# Altium PCB embedded-dev-26.PcbDoc
Units mil, origin at the board's own origin, x right, y up, seen from the top; angles counter-clockwise.
Board outline 6000 x 4000 mil, 2 copper layers (Top Layer, Bottom Layer); 113 components, 115 nets, 490 pads, 0 vias.
Unrouted connection lines stored in the file: 355.
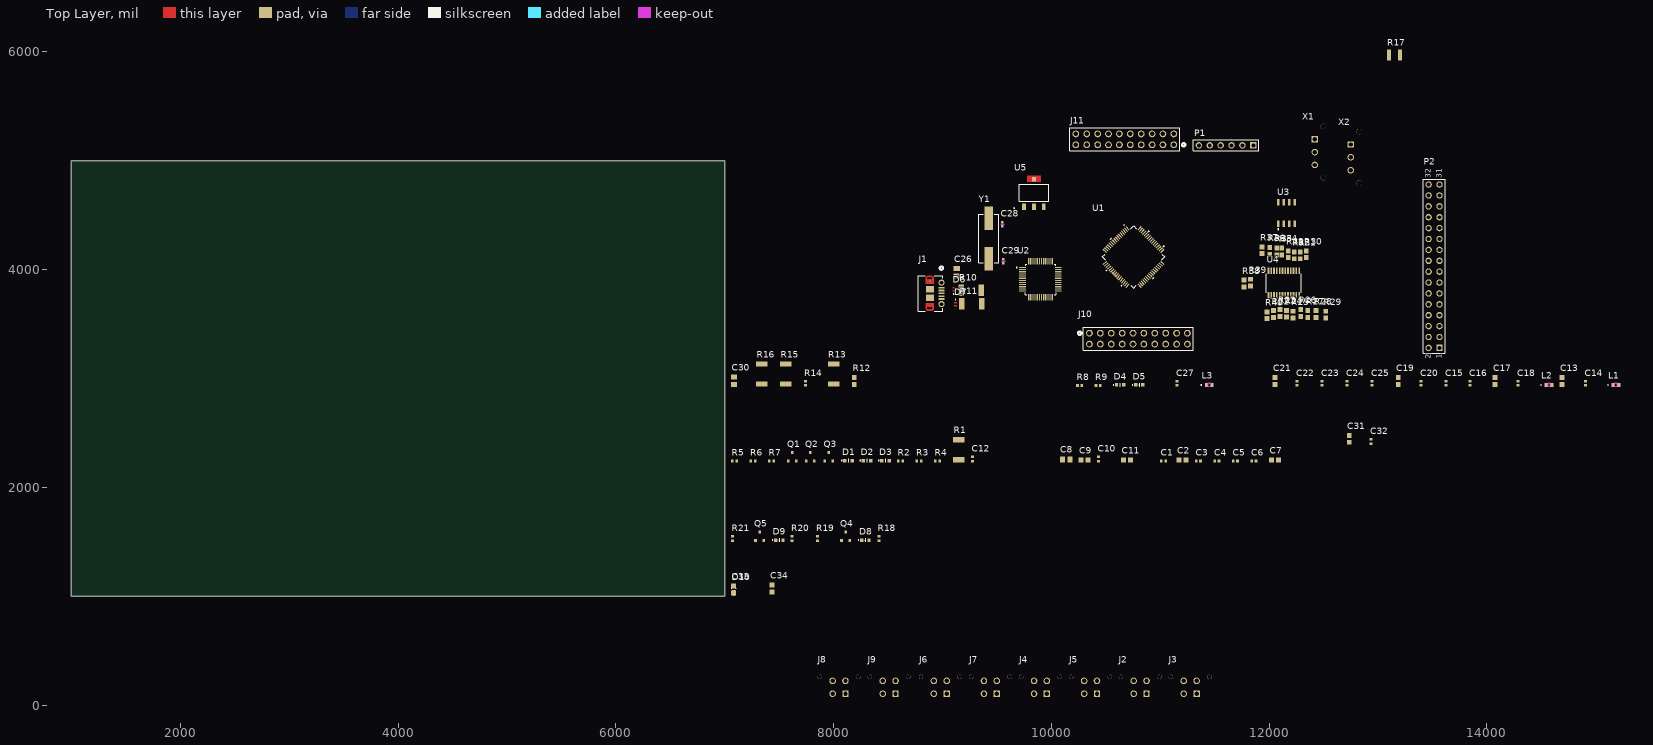
[diagram p0: Top Layer view]
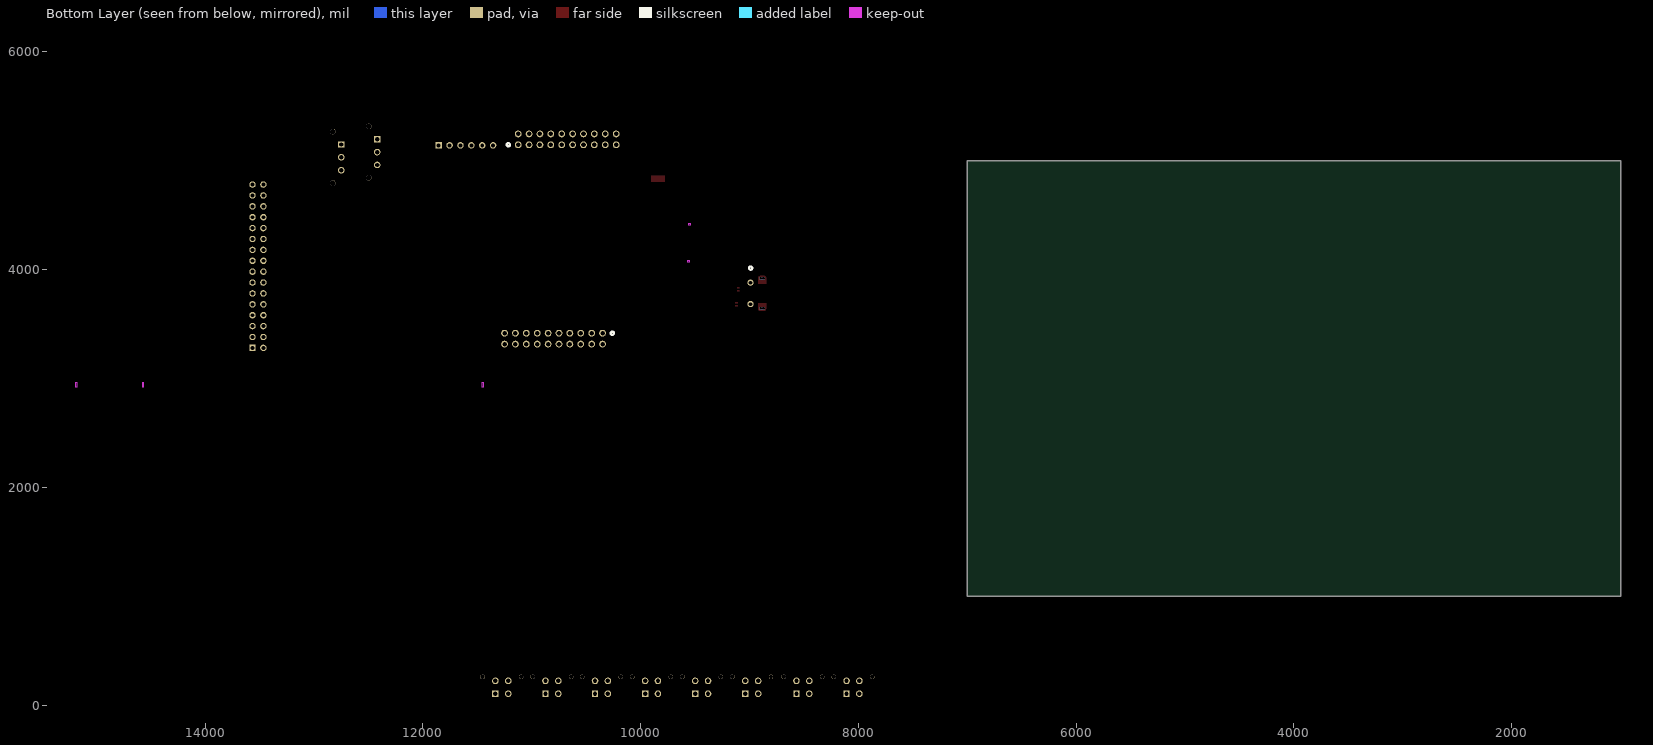
[diagram p1: Bottom Layer view, seen from below]

## Layer stack, top to bottom
Top Solder: solder mask 0.4, Solder Resist, Dk 3.5
Top Layer: signal copper 1.4
Dielectric 1: dielectric 12.6, FR-4, Dk 4.8
Bottom Layer: signal copper 1.4
Bottom Solder: solder mask 0.4, Solder Resist, Dk 3.5

## Board outline
1000,1000 7000,1000 7000,5000 1000,5000

## Design rules (kind name [scope] priority, off if disabled: settings)
Clearance [All] p1: gap=10 ignorepadtopadclearanceinfootprint=FALSE
DiffPairsRouting [All] p1: maxlimit=10 minlimit=10 mostfreqgap=10 toplayer_minwidth=15 toplayer_maxwidth=15 toplayer_prefwidth=15 bottomlayer_minwidth=15 bottomlayer_maxwidth=15 bottomlayer_prefwidth=15 maxuncoupledlength=500
PolygonConnect [All] p1: connectstyle=Relief reliefconductorwidth=10 reliefentries=4 polygonreliefangle="90 Angle" airgapwidth=10
RoutingVias [All] p1: holewidth=28 width=50 viastyle="Through Hole" minholewidth=28 minwidth=50 maxholewidth=28 maxwidth=50
SolderMaskExpansion [All] p1: expansion=4 istentingtop=FALSE
SupplyNets "Schematic Supply Nets_3" [InNet('5V')] p1: voltage=0.000
SupplyNets "Schematic Supply Nets_2" [InNet('3V3')] p2: voltage=0.000
SupplyNets "Schematic Supply Nets_1" [InNet('GND')] p3: voltage=0.000
Width [All] p1: maxlimit=10 minlimit=10 preferedwidth=10
29 further rules are at their usual default settings.

## Classes and differential pairs
component class U_USB_To_UART: C13 C14 C15 C16 C17 C18 C19 C20 C21 C22 C23 C24 C25 C26 C27 C28 C29 C30 D4 D5 D6 D7 D10 J1 L1 L2 L3 R8 R9 R10 R11 R12 R13 R14 R15 R16 U2 Y1
component class U_MCU: C1 C2 C3 C4 C5 C6 C7 C8 C9 C10 C11 C12 D1 D2 D3 J10 J11 P1 Q1 Q2 Q3 R1 R2 R3 R4 R5 R6 R7 U1
component class U_I2C_MUX: C31 C32 J2 J3 J4 J5 J6 J7 J8 J9 P2 R22 R23 R24 R25 R26 R27 R28 R29 R30 R31 R32 R33 R34 R35 R36 R37 R38 R39 R40 U4
component class U_CAN: D8 D9 Q4 Q5 R17 R18 R19 R20 R21 U3 X1 X2
component class U_3V3_LDO: C33 C34 U5
differential pair Data: +Data_P -Data_N
differential pair Data_In: +Data_In_P -Data_In_N
differential pair CAN: +CAN_H -CAN_L

## Components (designator, comment, footprint, x,y, rotation, side; value= is the part's Value field where it differs from the comment)
C1 "CC0402KRX7R7BB104" CAP-0402 11030,2240 r0 top
C2 "CC0603KRX5R8BB475" CAP-0603 11205,2250 r0 top
C3 "CC0402KRX7R7BB104" CAP-0402 11350,2240 r0 top
C4 "CC0402KRX7R7BB104" CAP-0402 11520,2240 r0 top
C5 "CC0402KRX7R7BB104" CAP-0402 11690,2240 r0 top
C6 "CC0402KRX7R7BB104" CAP-0402 11860,2240 r0 top
C7 "CC0603KRX5R8BB475" CAP-0603 12055,2250 r0 top
C8 "GRM2195C1H103JA01D" CAP-0805 10135,2255 r0 top
C9 "CC0603KRX7R7BB105" CAP-0603 10305,2250 r0 top
C10 "CC0402KRX7R7BB104" CAP-0402 10435,2260 r90 top
C11 "CC0603KRX7R7BB105" CAP-0603 10695,2250 r0 top
C12 "CC0402KRX7R7BB104" CAP-0402 9275,2260 r90 top
C13 "CC0603KRX5R8BB475" CAP-0603 14690,2975 r90 top
C14 "CC0402KRX7R7BB104" CAP-0402 14905,2955 r90 top
C15 "CC0402KRX7R7BB104" CAP-0402 13625,2955 r90 top
C16 "CC0402KRX7R7BB104" CAP-0402 13845,2955 r90 top
C17 "CC0603KRX5R8BB475" CAP-0603 14075,2975 r90 top
C18 "CC0402KRX7R7BB104" CAP-0402 14285,2955 r90 top
C19 "CC0603KRX5R8BB475" CAP-0603 13185,2975 r90 top
C20 "CC0402KRX7R7BB104" CAP-0402 13395,2955 r90 top
C21 "CC0603KRX5R8BB475" CAP-0603 12055,2975 r90 top
C22 "CC0402KRX7R7BB104" CAP-0402 12255,2955 r90 top
C23 "CC0402KRX7R7BB104" CAP-0402 12485,2955 r90 top
C24 "CC0402KRX7R7BB104" CAP-0402 12715,2955 r90 top
C25 "CC0402KRX7R7BB104" CAP-0402 12945,2955 r90 top
C26 "GRM2195C1H103JA01D" CAP-0805 9130,3975 r90 top
C27 "CC0402JRNPO9BN101" CAP-0402 11155,2955 r90 top
C28 "CC0402JRNPO9BN500" CAP_CC0402_YAG 9550,4415 r270 top
C29 "CC0402JRNPO9BN500" CAP_CC0402_YAG 9560,4075 r90 top
C30 "GRM2195C1H103JA01D" CAP-0805 7085,2980 r90 top
C31 "CC0603KRX5R8BB475" CAP-0603 12735,2445 r90 top
C32 "CC0402KRX7R7BB104" CAP-0402 12935,2420 r90 top
C33 "CC0603KRX5R8BB475" CAP-0603 7080,1060 r90 top
C34 "CC0603KRX7R7BB105" CAP-0603 7435,1070 r90 top
D1 "BL-HKC36G-AV-TRB" LED-0603 8080,2215 r0 top
D2 "BL-HKC36G-AV-TRB" LED-0603 8250,2215 r0 top
D3 "BL-HKC36G-AV-TRB" LED-0603 8420,2215 r0 top
D4 "BL-HKC36G-AV-TRB" LED-0603 10575,2910 r0 top
D5 "BL-HKC36G-AV-TRB" LED-0603 10750,2910 r0 top
D6 "ESD321DPYR" TVS_ESD321DPYR 9105,3818.78 r90 top
D7 "ESD321DPYR" TVS_ESD321DPYR 9120,3681.22 r270 top
D8 "BL-HKC36G-AV-TRB" LED-0603 8235,1485 r0 top
D9 "BL-HKC36G-AV-TRB" LED-0603 7445,1485 r0 top
D10 "ESDA7P60-1U1M" TVS_ESDA7P60-1U1M 7085,1070 r90 top
J1 "1050170001" CONN_1050170001_MOL 8890.39,3780.59 r270 top
J2 "Molex 43045-0412" CONN-4POS-0002 10815,103.43 r0 top
J3 "Molex 43045-0412" CONN-4POS-0002 11275,103.43 r0 top
J4 "Molex 43045-0412" CONN-4POS-0002 9900,103.43 r0 top
J5 "Molex 43045-0412" CONN-4POS-0002 10360,103.43 r0 top
J6 "Molex 43045-0412" CONN-4POS-0002 8980,103.43 r0 top
J7 "Molex 43045-0412" CONN-4POS-0002 9440,103.43 r0 top
J8 "Molex 43045-0412" CONN-4POS-0002 8050,103.43 r0 top
J9 "Molex 43045-0412" CONN-4POS-0002 8510,103.43 r0 top
J10 "10897201" CONN20_0010897201_MOL 10350,3415 r0 top
J11 "10897201" CONN20_0010897201_MOL 11125,5145 r180 top
L1 "BLM18AG601SN1D" FILTER_BLM18AG_MUR-L 15185,2940 r0 top
L2 "BLM18AG601SN1D" FILTER_BLM18AG_MUR-L 14570,2940 r0 top
L3 "BLM18AG601SN1D" FILTER_BLM18AG_MUR-L 11450,2940 r0 top
P1 "Header 6" HDR1X6 11855,5140 r180 top
P2 "61303421121" HDR2X16 13565,3280 r90 top
Q1 "T2N7002AK,LM" IC-SOT23-3 7620,2280 r0 top
Q2 "T2N7002AK,LM" IC-SOT23-3 7785,2280 r0 top
Q3 "T2N7002AK,LM" IC-SOT23-3 7955,2280 r0 top
Q4 "T2N7002AK,LM" IC-SOT23-3 8110,1550 r0 top
Q5 "T2N7002AK,LM" IC-SOT23-3 7320,1550 r0 top
R1 "CRF2010-J/-000ELF" RES-2010 9150,2345 r90 top
R2 "RC0402FR-07100RL" RES-0402 8615,2240 r0 top
R3 "RC0402FR-07100RL" RES-0402 8785,2240 r0 top
R4 "RC0402FR-07100RL" RES-0402 8955,2240 r0 top
R5 "RC0402FR-07470RL" RES-0402 7090,2240 r0 top
R6 "RC0402FR-07470RL" RES-0402 7260,2240 r0 top
R7 "RC0402FR-07470RL" RES-0402 7430,2240 r0 top
R8 "RM04FTN2200" RES-0402 10260,2935 r0 top
R9 "RM04FTN2200" RES-0402 10430,2935 r0 top
R10 "CRF2010-J/-000ELF" RES-2010 9263.46,3810 r180 top
R11 "CRF2010-J/-000ELF" RES-2010 9270,3685 r180 top
R12 "RC0603FR-0712KL" RES-0603 8190,2975 r90 top
R13 "CRF2010-J/-000ELF" RES-2010 8000,3040 r90 top
R14 "RC0402FR-0710KL" RES-0402 7740,2955 r90 top
R15 "CRF2010-J/-000ELF" RES-2010 7560,3040 r90 top
R16 "CRF2010-J/-000ELF" RES-2010 7340,3040 r90 top
R17 "RC1210FR-07120RL" RES-1210 13150,5970 r0 top
R18 "RC0402FR-07100RL" RES-0402 8415,1530 r90 top
R19 "RC0402FR-07470RL" RES-0402 7850,1530 r90 top
R20 "RC0402FR-07100RL" RES-0402 7620,1530 r90 top
R21 "RC0402FR-07470RL" RES-0402 7070,1530 r90 top
R22 "RC0603FR-074K7L" RES-0603 12040,3590 r90 top
R23 "RC0603FR-074K7L" RES-0603 12100,3600 r90 top
R24 "RC0603FR-074K7L" RES-0603 12160,3593.5 r90 top
R25 "RC0603FR-074K7L" RES-0603 12220,3585 r90 top
R26 "RC0603FR-074K7L" RES-0603 12290,3600 r90 top
R27 "RC0603FR-074K7L" RES-0603 12355,3590 r90 top
R28 "RC0603FR-074K7L" RES-0603 12430,3590 r90 top
R29 "RC0603FR-074K7L" RES-0603 12520,3585 r90 top
R30 "RC0603FR-074K7L" RES-0603 12340,4140 r270 top
R31 "RC0603FR-074K7L" RES-0603 12285,4130 r270 top
R32 "RC0603FR-074K7L" RES-0603 12230,4130 r270 top
R33 "RC0603FR-074K7L" RES-0603 12175,4140 r270 top
R34 "RC0603FR-074K7L" RES-0603 12115,4165 r270 top
R35 "RC0603FR-074K7L" RES-0603 12070,4166.5 r270 top
R36 "RC0603FR-074K7L" RES-0603 12005,4171.5 r270 top
R37 "RC0603FR-074K7L" RES-0603 11935,4176.5 r270 top
R38 "RC0603FR-074K7L" RES-0603 11770,3870 r90 top
R39 "RC0603FR-074K7L" RES-0603 11830,3878.5 r90 top
R40 "RC0603FR-074K7L" RES-0603 11980,3580 r90 top
U1 "STM32G431RBT6" LQFP64-10x10mm 10755,4115 r315 top
U2 "FT232HL-REEL" QFP50P900X900X160-48N 9900,3910 r0 top
U3 "TCAN1044VDRQ1" IC-8SOIC 12160,4518.43 r0 top
U4 "TCA9548APWR" SOP65P640X120-24N 12135,3875 r90 top
U5 "MCP1826S-3302E/DB" SOT-223_3MC_MCH 9840,4705 r0 top
X1 "Molex 43650-0315" 43650-0315 12420,5078.11 r90 top
X2 "Molex 43650-0315" 43650-0315 12750,5030 r90 top
Y1 "830010043" WE-XTAL_HC49/4HSMX 9425,4285 r270 top

## Footprints (in the part's own frame and the unit in brackets; to place one, negate y for a bottom-side part, rotate by r counter-clockwise, add the part's x,y. Pads: shape width x height; smd on the part's side, far side on the other; paste and mask are expansions set on the pad)
43650-0315 [mm]
  round 1.27 hole 1.27 unplated: 1(-6,-1.96) 1(6,-1.96)
  rect 1.482x1.482 / inner rect 1.524x1.524 / far side rect 1.482x1.482 hole 1.02: P$1(3,0)
  round 1.53 / inner round 1.524 / far side round 1.53 hole 1.02: P$2(0,0) P$3(-3,0)
  body extent -6.32,-2.47 6.33,3.14, height 10.03
CAP-0402 [mm]
  rect 0.6x0.7 smd: 1(-0.5,0) 2(0.5,0)
  body extent -0.5,-0.22 0.5,0.23, height 0.5
CAP-0603 [mm]
  rect 1.15x1.1 smd: 1(-0.8,0) 2(0.8,0)
  body extent -0.8,-0.45 0.8,0.45, height 0.8
CAP-0805 [mm]
  rect 1.16x1.47 smd: 1(-0.88,0) 2(0.88,0)
  body extent -1,-0.63 1,0.63, height 0.94
CAP_CC0402_YAG [mil]
  rect 22x22 smd paste+0 mask+0: 1(-17.5,0) 2(17.5,0)
  Top Layer keep-out region: -4.5,-9 -4.5,9 4.5,9 4.5,-9
  Keep-Out Layer region: -4.5,-11 -4.5,11 4.5,11 4.5,-11
  body extent -21,-11 21,11, height 22
CONN20_0010897201_MOL [mil]
  round 62 / inner round 60 / far side round 62 hole 42 paste-99999 mask+0: 1(0,0) 2(0,-100) 3(100,0) 4(100,-100) 5(200,0) 6(200,-100) 7(300,0) 8(300,-100) 9(400,0) 10(400,-100) 11(500,0) 12(500,-100) 13(600,0) 14(600,-100) 15(700,0) 16(700,-100) 17(800,0) 18(800,-100) 19(900,0) 20(900,-100)
  silkscreen extent -105,-155 955,55
CONN-4POS-0002 [mm]
  round 1.02 hole 1.02 unplated: 1(-4.5,3.94) 1(4.5,3.94)
  rect 1.482x1.482 / inner rect 1.524x1.524 / far side rect 1.482x1.482 hole 1.02: 1(1.5,0)
  round 1.53 / inner round 1.524 / far side round 1.53 hole 1.02: 2(-1.5,0) 3(1.5,3) 4(-1.5,3)
  body extent -5.07,-2.45 5.08,6.32, height 10.03
CONN_1050170001_MOL [mil]
  rect 16x53 smd paste+0 mask+0: 1(-51.18,99.61) 2(-25.59,99.61) 3(0,99.61) 4(25.59,99.61) 5(51.18,99.61)
  round 57 / inner round 60 / far side round 57 hole 33 paste-99999 mask-28.5: 6(-98.43,100.59) 7(98.43,100.59)
  rect 5x5 smd paste-2.5 mask-2.5: 8(-114.17,-5.7) 9(114.17,-5.7)
  rect 59x75 smd paste-37.5 mask-37.5: 10(-39.37,-5.7) 11(39.37,-5.7)
  round 24 / inner round 60 / far side round 24 hole 24 unplated paste-99999 mask+0: S_1_H1(-137.8,7.8) S_1_H2(-137.8,-19.2) S_2_H1(137.8,7.8) S_2_H2(137.8,-19.2)
  Top Layer region: -142.38,31.34 -137.67,31.8 -90.67,31.8 -90.67,-43.2 -137.67,-43.2 -142.38,-42.75 -146.79,-41.42 -150.85,-39.24 -154.41,-36.32 -157.33,-32.76 -159.51,-28.7 -160.84,-24.29 -161.3,-19.7 -161.3,8.3 -160.84,12.88 -159.51,17.29 -157.33,21.35 -154.41,24.91 -150.85,27.83 -146.79,30.01
  Top Layer region: 90.67,-43.2 90.67,31.8 137.8,31.8 142.38,31.34 146.79,30.01 150.85,27.83 154.41,24.91 157.33,21.35 159.51,17.29 160.84,12.88 161.3,8.3 161.3,-19.7 160.84,-24.29 159.51,-28.7 157.33,-32.76 154.41,-36.32 150.85,-39.24 146.79,-41.42 142.38,-42.75 137.8,-43.2
  Multi-Layer lines w24: 137.8,-19.2 137.8,7.8 ; -137.8,-19.2 -137.8,7.8
  silkscreen extent -247,-112 163,115, body extent -161,-99 161,113, height 113
FILTER_BLM18AG_MUR-L [mil]
  rect 30x35 smd paste+0 mask+0: 1(-25.5,0) 2(25.5,0)
  Top Layer keep-out region: -8.5,-16.5 -8.5,16.5 8.5,16.5 8.5,-16.5
  Keep-Out Layer region: -8.5,-18.5 -8.5,18.5 8.5,18.5 8.5,-18.5
  silkscreen extent -76,-3 -70,3, body extent -34,-19 34,19, height 37
HDR1X6 [mm] "Connector; Header; 6 Position"
  rect 1.5x1.5 hole 0.9: 1(0,0)
  round 1.5 hole 0.9: 2(2.54,0) 3(5.08,0) 4(7.62,0) 5(10.16,0) 6(12.7,0)
  silkscreen extent -1.27,-1.27 13.97,1.27
HDR2X16 [mm] "Connector; Header; 16x2 Position"
  rect 1.5x1.5 hole 0.9: 1(0,0)
  round 1.5 hole 0.9: 2(0,2.54) 3(2.54,0) 4(2.54,2.54) 5(5.08,0) 6(5.08,2.54) 7(7.62,0) 8(7.62,2.54) 9(10.16,0) 10(10.16,2.54) 11(12.7,0) 12(12.7,2.54) 13(15.24,0) 14(15.24,2.54) 15(17.78,0) 16(17.78,2.54) 17(20.32,0) 18(20.32,2.54) 19(22.86,0) 20(22.86,2.54) 21(25.4,0) 22(25.4,2.54) 23(27.94,0) 24(27.94,2.54) 25(30.48,0) 26(30.48,2.54) 27(33.02,0) 28(33.02,2.54) 29(35.56,0) 30(35.56,2.54) 31(38.1,0) 32(38.1,2.54)
  silkscreen extent -1.27,-1.27 39.37,3.81
IC-8SOIC [mm]
  rect 0.6x1.5 smd: 1(-1.905,-2.5) 2(-0.635,-2.5) 3(0.635,-2.5) 4(1.905,-2.5) 5(1.905,2.5) 6(0.635,2.5) 7(-0.635,2.5) 8(-1.905,2.5)
  silkscreen extent -2.03,-3.93 -1.78,-3.69, body extent -2.45,-3 2.45,3, height 1.75
IC-SOT23-3 [mm]
  rect 0.6x0.7 smd: 1(-0.95,-1) 2(0.95,-1) 3(0,1)
  body extent -1.46,-1.18 1.46,1.19, height 1.12
LED-0603 [mm]
  rect 0.8x0.8 smd: 1(2.291,0.751) 2(0.589,0.751)
  silkscreen extent -0.2,0.34 1.52,1.13, body extent 0.65,0.36 2.25,1.16, height 0.39
LQFP64-10x10mm [mil]
  rect 47x12 smd paste+0 mask+0: 1(-226.38,147.64) 2(-226.38,127.95) 3(-226.38,108.27) 4(-226.38,88.58) 5(-226.38,68.9) 6(-226.38,49.21) 7(-226.38,29.53) 8(-226.38,9.84) 9(-226.38,-9.84) 10(-226.38,-29.53) 11(-226.38,-49.21) 12(-226.38,-68.9) 13(-226.38,-88.58) 14(-226.38,-108.27) 15(-226.38,-127.95) 16(-226.38,-147.64) 33(226.38,-147.64) 34(226.38,-127.95) 35(226.38,-108.27) 36(226.38,-88.58) 37(226.38,-68.9) 38(226.38,-49.21) 39(226.38,-29.53) 40(226.38,-9.84) 41(226.38,9.84) 42(226.38,29.53) 43(226.38,49.21) 44(226.38,68.9) 45(226.38,88.58) 46(226.38,108.27) 47(226.38,127.95) 48(226.38,147.64)
  rect 12x47 smd paste+0 mask+0: 17(-147.64,-226.38) 18(-127.95,-226.38) 19(-108.27,-226.38) 20(-88.58,-226.38) 21(-68.9,-226.38) 22(-49.21,-226.38) 23(-29.53,-226.38) 24(-9.84,-226.38) 25(9.84,-226.38) 26(29.53,-226.38) 27(49.21,-226.38) 28(68.9,-226.38) 29(88.58,-226.38) 30(108.27,-226.38) 31(127.95,-226.38) 32(147.64,-226.38) 49(147.64,226.38) 50(127.95,226.38) 51(108.27,226.38) 52(88.58,226.38) 53(68.9,226.38) 54(49.21,226.38) 55(29.53,226.38) 56(9.84,226.38) 57(-9.84,226.38) 58(-29.53,226.38) 59(-49.21,226.38) 60(-68.9,226.38) 61(-88.58,226.38) 62(-108.27,226.38) 63(-127.95,226.38) 64(-147.64,226.38)
  silkscreen extent -273,-270 270,270, body extent -236,-236 236,236, height 63
QFP50P900X900X160-48N [mm]
  rect 1.56x0.28 smd: 1(-4.18,2.75) 2(-4.18,2.25) 3(-4.18,1.75) 4(-4.18,1.25) 5(-4.18,0.75) 6(-4.18,0.25) 7(-4.18,-0.25) 8(-4.18,-0.75) 9(-4.18,-1.25) 10(-4.18,-1.75) 11(-4.18,-2.25) 12(-4.18,-2.75) 25(4.18,-2.75) 26(4.18,-2.25) 27(4.18,-1.75) 28(4.18,-1.25) 29(4.18,-0.75) 30(4.18,-0.25) 31(4.18,0.25) 32(4.18,0.75) 33(4.18,1.25) 34(4.18,1.75) 35(4.18,2.25) 36(4.18,2.75)
  rect 0.28x1.56 smd: 13(-2.75,-4.18) 14(-2.25,-4.18) 15(-1.75,-4.18) 16(-1.25,-4.18) 17(-0.75,-4.18) 18(-0.25,-4.18) 19(0.25,-4.18) 20(0.75,-4.18) 21(1.25,-4.18) 22(1.75,-4.18) 23(2.25,-4.18) 24(2.75,-4.18) 37(2.75,4.18) 38(2.25,4.18) 39(1.75,4.18) 40(1.25,4.18) 41(0.75,4.18) 42(0.25,4.18) 43(-0.25,4.18) 44(-0.75,4.18) 45(-1.25,4.18) 46(-1.75,4.18) 47(-2.25,4.18) 48(-2.75,4.18)
  silkscreen extent -5.6,-3.55 3.55,3.55, body extent -4.5,-4.5 4.5,4.5, height 1.6
RES-0402 [mm]
  rect 0.6x0.7 smd: 1(-0.5,0) 2(0.5,0)
  body extent -0.5,-0.25 0.5,0.25, height 0.3
RES-0603 [mm]
  rect 1.15x1.1 smd: 1(-0.8,0) 2(0.8,0)
  body extent -0.8,-0.4 0.8,0.4, height 0.43
RES-1210 [mm] "Chip Resistor, 2-Leads, Body 3.10x2.60mm, IPC High Density"
  rect 0.95x2.6 smd: 1(-1.275,0) 2(1.275,0)
  body extent -1.6,-1.35 1.6,1.35, height 0.6
RES-2010 [mm]
  rect 1.26x2.72 smd: 1(-2.325,0) 2(2.325,0)
  body extent -2.5,-1.25 2.5,1.25, height 0.7
SOP65P640X120-24N [mm]
  rrect25% 1.57x0.41 smd: 1(-2.87,3.575) 2(-2.87,2.925) 3(-2.87,2.275) 4(-2.87,1.625) 5(-2.87,0.975) 6(-2.87,0.325) 7(-2.87,-0.325) 8(-2.87,-0.975) 9(-2.87,-1.625) 10(-2.87,-2.275) 11(-2.87,-2.925) 12(-2.87,-3.575) 13(2.87,-3.575) 14(2.87,-2.925) 15(2.87,-2.275) 16(2.87,-1.625) 17(2.87,-0.975) 18(2.87,-0.325) 19(2.87,0.325) 20(2.87,0.975) 21(2.87,1.625) 22(2.87,2.275) 23(2.87,2.925) 24(2.87,3.575)
  silkscreen extent -4.54,-4.1 2.2,4.1, body extent -3.2,-3.9 3.2,3.9, height 1.2
SOT-223_3MC_MCH [mil]
  rect 35x58 smd paste+0 mask+0: 1(-90.55,-128.7) 2(0,-128.7) 3(90.55,-128.7)
  rect 35x40 smd paste+0 mask+0: 4(0,125.27)
  Top Layer region: 62,99.7 62,157.7 -62,157.7 -62,99.7
  silkscreen extent -187,-149 137,78, body extent -132,-144 132,144, height 71
TVS_ESD321DPYR [mm]
  rect 0.1x0.1 smd paste-1 mask+0: 1(-0.35,0) 2(0.35,0)
  Top Layer region: -0.242,0.249 -0.24,0.249 -0.237,0.248 -0.235,0.248 -0.232,0.247 -0.23,0.246 -0.227,0.245 -0.225,0.243 -0.223,0.242 -0.221,0.24 -0.219,0.239 -0.217,0.237 -0.215,0.235 -0.213,0.233 -0.211,0.231 -0.21,0.229 -0.208,0.227 -0.207,0.225 -0.205,0.223 -0.204,0.22 -0.203,0.218 -0.202,0.215 -0.202,0.213 -0.201,0.21 -0.201,0.208 -0.2,0.205 -0.2,0.203 -0.2,0.2 -0.2,-0.2 -0.2,-0.203 -0.2,-0.205 -0.201,-0.208 -0.201,-0.21 -0.202,-0.213 -0.202,-0.215 -0.203,-0.218 -0.204,-0.22 -0.205,-0.223 -0.207,-0.225 -0.208,-0.227 -0.21,-0.229 -0.211,-0.231 -0.213,-0.233 -0.215,-0.235 -0.217,-0.237 -0.219,-0.239 -0.221,-0.24 -0.223,-0.242 -0.225,-0.243 -0.227,-0.245 -0.23,-0.246 -0.232,-0.247 -0.235,-0.248 -0.237,-0.248 -0.24,-0.249 -0.242,-0.249 -0.245,-0.25 -0.455,-0.25 -0.458,-0.249 -0.46,-0.249 -0.463,-0.248 -0.465,-0.248 -0.468,-0.247 -0.47,-0.246 -0.473,-0.245 -0.475,-0.243 -0.477,-0.242 -0.479,-0.24 -0.481,-0.239 -0.483,-0.237 -0.485,-0.235 -0.487,-0.233 -0.489,-0.231 -0.49,-0.229 -0.492,-0.227 -0.493,-0.225 -0.495,-0.223 -0.496,-0.22 -0.497,-0.218 -0.498,-0.215 -0.498,-0.213 -0.499,-0.21 -0.499,-0.208 -0.5,-0.205 -0.5,-0.203 -0.5,-0.2 -0.5,0.2 -0.5,0.203 -0.5,0.205 -0.499,0.208 -0.499,0.21 -0.498,0.213 -0.498,0.215 -0.497,0.218 -0.496,0.22 -0.495,0.223 -0.493,0.225 -0.492,0.227 -0.49,0.229 -0.489,0.231 -0.487,0.233 -0.485,0.235 -0.483,0.237 -0.481,0.239 -0.479,0.24 -0.477,0.242 -0.475,0.243 -0.473,0.245 -0.47,0.246 -0.468,0.247 -0.465,0.248 -0.463,0.248 -0.46,0.249 -0.458,0.249 -0.455,0.25 -0.245,0.25
  Top Layer region: 0.458,0.249 0.46,0.249 0.463,0.248 0.465,0.248 0.468,0.247 0.47,0.246 0.473,0.245 0.475,0.243 0.477,0.242 0.479,0.24 0.481,0.239 0.483,0.237 0.485,0.235 0.487,0.233 0.489,0.231 0.49,0.229 0.492,0.227 0.493,0.225 0.495,0.223 0.496,0.22 0.497,0.218 0.498,0.215 0.498,0.213 0.499,0.21 0.499,0.208 0.5,0.205 0.5,0.203 0.5,0.2 0.5,-0.2 0.5,-0.203 0.5,-0.205 0.499,-0.208 0.499,-0.21 0.498,-0.213 0.498,-0.215 0.497,-0.218 0.496,-0.22 0.495,-0.223 0.493,-0.225 0.492,-0.227 0.49,-0.229 0.489,-0.231 0.487,-0.233 0.485,-0.235 0.483,-0.237 0.481,-0.239 0.479,-0.24 0.477,-0.242 0.475,-0.243 0.473,-0.245 0.47,-0.246 0.468,-0.247 0.465,-0.248 0.463,-0.248 0.46,-0.249 0.458,-0.249 0.455,-0.25 0.245,-0.25 0.242,-0.249 0.24,-0.249 0.237,-0.248 0.235,-0.248 0.232,-0.247 0.23,-0.246 0.227,-0.245 0.225,-0.243 0.223,-0.242 0.221,-0.24 0.219,-0.239 0.217,-0.237 0.215,-0.235 0.213,-0.233 0.211,-0.231 0.21,-0.229 0.208,-0.227 0.207,-0.225 0.205,-0.223 0.204,-0.22 0.203,-0.218 0.202,-0.215 0.202,-0.213 0.201,-0.21 0.201,-0.208 0.2,-0.205 0.2,-0.203 0.2,-0.2 0.2,0.2 0.2,0.203 0.2,0.205 0.201,0.208 0.201,0.21 0.202,0.213 0.202,0.215 0.203,0.218 0.204,0.22 0.205,0.223 0.207,0.225 0.208,0.227 0.21,0.229 0.211,0.231 0.213,0.233 0.215,0.235 0.217,0.237 0.219,0.239 0.221,0.24 0.223,0.242 0.225,0.243 0.227,0.245 0.23,0.246 0.232,0.247 0.235,0.248 0.237,0.248 0.24,0.249 0.242,0.249 0.245,0.25 0.455,0.25
  silkscreen extent -1.2,-0.1 -1,0.1, body extent -0.5,-0.3 0.5,0.3, height 0.45
TVS_ESDA7P60-1U1M [mm]
  rect 0.55x0.8 smd: 1(-0.625,0) 2(0.625,0)
  silkscreen extent -1.6,-0.5 0.03,0.5, body extent -0.8,-0.53 0.8,0.47, height 0.6
WE-XTAL_HC49/4HSMX [mm] "Quartz Crystal, size HC49/4HSMX, body 11.4x4.9mm"
  rect 5.5x2 smd: 1(-4.75,0) 2(4.75,0)
  silkscreen extent -5.65,-2.35 5.65,2.35, body extent -6.7,-2.45 6.7,2.45, height 4.4

## Part data
C1 C3 C4 C5 C6 C10 C12 C14 C15 C16 C18 C20 C22 C23 C24 C25 C32: library part CAP-0.1U-0001, "CAP CER 0.1UF 16V X7R 0402", Capacitance="100 nF", Voltage Rating="16 V", ComponentLink2Description=Datasheet, ComponentLink2URL=https://www.yageo.com/upload/media/product/productsearch/datasheet/mlcc/UPY-GPHC_X7R_6.3V-to-250V_24.pdf, Device Class=Ceramic, Size=0402
C2 C7 C13 C17 C19 C21 C31 C33: library part CAP-4.7U-0001, "CAP CER 4.7UF 25V X5R 0603", Capacitance="4.7 uF", Voltage=25V, Device Class=Ceramic, Size=0603
C8 C26 C30: library part CAP-10N-0001, "CAP CER 10000PF 50V C0G/NP0 0805", Capacitance=10nF, Voltage=50V, ComponentLink1Description=Datasheet, ComponentLink1URL=https://search.murata.co.jp/Ceramy/image/img/A01X/G101/ENG/GRM2195C1H103JA01-01.pdf, Device Class=Ceramic, Size=0805
C9 C11 C34: library part CAP-1U-0002, "CAP CER 1UF 16V X7R 0603", Capacitance="1.0 uF", Voltage=16V, Device Class=Ceramic, Size=0603
C27: library part CAP-100P-0001, "CAP CER 100PF 50V C0G/NPO 0402", Capacitance="100 pF", Voltage=50V, ComponentLink1Description=Datasheet, ComponentLink1URL=https://www.yageo.com/upload/media/product/productsearch/datasheet/mlcc/UPY-GP_NP0_16V-to-50V_18.pdf, Device Class=Ceramic, Size=0402
C28 C29: library part CAP-50p, "50 pF ±5% 50V Ceramic Capacitor C0G, NP0 0402 (1005 Metric)", Capacitance=50pF, Manufacturer_Name=Yageo, Voltage=50V, ComponentLink1Description=Datasheet, ComponentLink1URL=https://www.yageo.com/en/Chart/Download/pdf/CC0402JRNPO9BN500, Copyright="Copyright (C) 2025 Ultra Librarian. All rights reserved.", Manufacturer_Part_Number=CC0402JRNPO9BN500
D1 D2 D3 D4 D5 D8 D9: library part LED-0001, "LED YELLOW CLEAR 0603 SMD", Forward Current=30mA, Forward Voltage=2V, ComponentLink1Description=Datasheet, ComponentLink1URL=https://www.americanbrightled.com/pdffiles/led-components/smt/BL-HKC36G-AV-TRB.pdf
D6 D7: library part DIO-TVS-0004, "0.8-pF 3.3-V Â±30-kV ESD protection diode with 6.8-V 16-A TLP clamping in 0402 package for USB 2.0", Capacitance=0.8pF, Package="X1SON-2 Texas Instruments", Voltage=1kV, Check_prices=https://www.snapeda.com/parts/ESD321DPYR/Texas+Instruments/view-part/?ref=eda, ComponentLink1Description=Datasheet, ComponentLink1URL=https://www.ti.com/general/docs/suppproductinfo.tsp?distId=10&gotoUrl=https%3A%2F%2Fwww.ti.com%2Flit%2Fgpn%2Fesd321, MF="Texas Instruments", MP=ESD321DPYR, SnapEDA_Link=https://www.snapeda.com/parts/ESD321DPYR/Texas+Instruments/view-part/?ref=snap
D10: library part DIO-TVS-11V, "TVS DIODE 5VWM 11.6VC 1610", Package=None, Voltage=11.6V, Availability=Unavailable, ComponentLink1Description=Datasheet, ComponentLink1URL=https://www.st.com/resource/en/datasheet/esda20p50-1u1m.pdf, MF="{'manufacturer': u'STMicroelectronics'}", MP=ESDA7P60-1U1M, Price=None
J1: library part CONN-Micro-USB-B, "Micro-USB B Receptacle, Bottom Mount, Surface Mount, Lead-Free, 0.60mm Tabs, TID", Manufacturer_Name="Molex Connector Corporation", Copyright="Copyright (C) 2025 Ultra Librarian. All rights reserved.", Datasheet=https://www.molex.com/en-us/products/part-detail-pdf/1050170001?display=pdf, Manufacturer_Part_Number=1050170001, RefDes=RefDes, Type=Type
J2 J3 J4 J5 J6 J7 J8 J9: library part CONN-4POS-0002, "CONN HEADER VERT 4POS 3MM", ComponentLink1Description=Datasheet, ComponentLink1URL=https://www.molex.com/content/dam/molex/molex-dot-com/products/automated/en-us/salesdrawingpdf/430/43045/430450412_sd.pdf?inline
J10 J11: library part CONN-20, "2.54mm Pitch C-Grid Breakaway Header, Dual Row, Vertical, High Temperature, 20 Circuits, Tin (Sn) Plating, 2.72mm PC Tail Length", Manufacturer_Name="Molex Connector Corporation", Copyright="Copyright (C) 2025 Ultra Librarian. All rights reserved.", Datasheet=https://www.molex.com/en-us/products/part-detail-pdf/10897201?display=pdf, Manufacturer_Part_Number=10897201, RefDes=RefDes, Type=Type
L1 L2 L3: library part FBEAD-600R-0.5A, "600 Ohms @ 100 MHz 1 Ferrite Bead 0603 (1608 Metric) 500mA 380mOhm", Current=500mA, Manufacturer_Name=Murata, Resistance=600R, ComponentLink1Description=Datasheet, ComponentLink1URL=https://www.murata.com/en-us/products/productdata/8796738650142/ENFA0003.pdf, Copyright="Copyright (C) 2025 Ultra Librarian. All rights reserved.", Manufacturer_Part_Number=BLM18AG601SN1D
P1: "Header, 6-Pin", LatestRevisionDate=17-Jul-2002, LatestRevisionNote="Re-released for DXP Platform.", Publisher="Altium Limited"
P2: library part "Header 16X2", "Header, 16-Pin, Dual row", LatestRevisionDate=17-Jul-2002, LatestRevisionNote="Re-released for DXP Platform.", Publisher="Altium Limited"
Q1 Q2 Q3 Q4 Q5: library part NMOS-200MA-0001, "MOSFET N-CH 60V 200MA SOT23", Continuous Current=200mA, Voltage=60V, ComponentLink1Description=Datasheet, ComponentLink1URL=https://toshiba.semicon-storage.com/info/T2N7002AK_datasheet_en_20150401.pdf?did=29712&prodName=T2N7002AK
R1 R10 R11 R13 R15 R16: library part RES-0-0001, "0 Ohms Jumper Chip Resistor 2010 (5025 Metric) Automotive AEC-Q200 Metal Element", Resistance=0Ω, Tolerance=1%, ComponentLink1Description=Datasheet, ComponentLink1URL=https://www.yageo.com/upload/media/product/products/datasheet/rchip/PYu-RC_Group_51_RoHS_L_12.pdf, Size=0402
R2 R3 R4 R18 R20: library part RES-100-0001, "RES 100 OHM 1% 1/16W 0402", Power=1/16W, Resistance=100R, Tolerance=1%, ComponentLink1Description=Datasheet, ComponentLink1URL=https://www.yageo.com/upload/media/product/products/datasheet/rchip/PYu-RC_Group_51_RoHS_L_12.pdf, Size=0402
R5 R6 R7 R19 R21: library part RES-470-0001, "RES 470 OHM 1% 1/16W 0402", Power=1/16W, Resistance=470R, Tolerance=1%, ComponentLink1Description=Datasheet, ComponentLink1URL=https://www.yageo.com/upload/media/product/products/datasheet/rchip/PYu-RC_Group_51_RoHS_L_12.pdf, Size=0402
R8 R9: library part RES-220-0002-JLC, "62.5mW Thick Film Resistors 50V ±100ppm/℃ ±1% -55℃~+155℃ 220Ω 0402  Chip Resistor - Surface Mount ROHS", JLC part number=C160487, Power="1/16 W", Resistance="220 Ohm +/- 1%", Assembled?=yes
R12: library part RES-12k-0001, "RES 12K OHM 1% 1/10W 0603", Power=1/10W, Resistance=12k, Tolerance=1%, ComponentLink1Description=Datasheet, ComponentLink1URL=https://www.lcsc.com/datasheet/lcsc_datasheet_2304140030_YAGEO-RC0603FR-0712KL_C114659.pdf, Size=0603
R14: library part RES-10k-0001, "RES 10K OHM 1% 1/16W 0402", Power=1/16W, Resistance=10k, Tolerance=1%, ComponentLink1Description=Datasheet, ComponentLink1URL=https://www.yageo.com/upload/media/product/products/datasheet/rchip/PYu-RC_Group_51_RoHS_L_12.pdf, Size=0402
R17: library part RES-120-0001, "RES 120 OHM 1% 1/2W 1210", Power=1/2W, Resistance=120R, Tolerance=1%, ComponentLink1Description=Datasheet, ComponentLink1URL=https://www.yageo.com/upload/media/product/products/datasheet/rchip/PYu-RC_Group_51_RoHS_L_12.pdf, Size=1210
R22 R23 R24 R25 R26 R27 R28 R29 R30 R31 R32 R33 R34 R35 R36 R37 R38 R39 R40: library part RES-4.7k-0001, "RES 4.7K OHM 1% 1/10W 0603", Power=1/10W, Resistance=4.7k, Tolerance=1%, ComponentLink1Description=Datasheet, ComponentLink1URL=https://www.yageo.com/upload/media/product/products/datasheet/rchip/PYu-RC_Group_51_RoHS_L_12.pdf, Size=0603
U1: library part IC-STM32G431RBT6, "Mainstream Arm Cortex-M4 MCU 170 MHz with 128 Kbytes of Flash memory, Math Accelerator, Medium Analog level integration", Manufacturer_Name=STMicroelectronics, Copyright="Copyright (C) 2025 Ultra Librarian. All rights reserved.", Datasheet=https://www.st.com/resource/en/datasheet/stm32g431c6.pdf, Manufacturer_Part_Number=STM32G431RBT6, RefDes=RefDes, Type=Type
U2: library part IC-USB-TO_UART, "Ic, Interface; Usb Hi-Speed To Uart/Fifo/Spi/Jtag, I2c; 1.8v-5.25v; 25ma; Lqfp-48", Package="LQFP-48 FTDI", Availability="In Stock", Check_prices=https://www.snapeda.com/parts/FT232HL-REEL/FTDI%252C+Future+Technology+Devices+International+Ltd/view-part/?ref=eda, ComponentLink1Description=Datasheet, ComponentLink1URL=https://ftdichip.com/wp-content/uploads/2023/09/DS_FT232H.pdf, MF="FTDI, Future", MP=FT232HL-REEL, Price=None, Purchase-URL=https://pricing.snapeda.com/search/part/FT232HL-REEL/?ref=eda, SnapEDA_Link=https://www.snapeda.com/parts/FT232HL-REEL/FTDI%252C+Future+Technology+Devices+International+Ltd/view-part/?ref=snap
U3: library part IC-CAN-0001, "IC TRANSCEIVER 1/1 8SOIC", ComponentLink1Description=Datasheet, ComponentLink1URL=https://www.ti.com/lit/ds/symlink/tcan1044-q1.pdf?HQS=dis-dk-null-digikeymode-dsf-pf-null-wwe&ts=1728758303289&ref_url=https%253A%252F%252Fwww.ti.com%252Fgeneral%252Fdocs%252Fsuppproductinfo.tsp%253FdistId%253D10%2526gotoUrl%253Dhttps%253A%252F%252Fwww.ti.com%252Flit%252Fgpn%252Ftcan1044-q1
U4: library part IC-MUX-0002, "8-channel 1.65- to 5.5-V I2C/SMBus switch with reset & voltage translation", Package="TSSOP-24 Texas Instruments", Check_prices=https://www.snapeda.com/parts/TCA9548APWR/Texas+Instruments/view-part/?ref=eda, ComponentLink1Description=Datasheet, ComponentLink1URL=https://www.ti.com/general/docs/suppproductinfo.tsp?distId=10&gotoUrl=https%3A%2F%2Fwww.ti.com%2Flit%2Fgpn%2Ftca9548a, MF="Texas Instruments", MP=TCA9548APWR, SnapEDA_Link=https://www.snapeda.com/parts/TCA9548APWR/Texas+Instruments/view-part/?ref=snap
U5: library part IC-LDO-0003, "Linear Voltage Regulator IC Positive Fixed 1 Output 1A SOT-223-3", Manufacturer_Name=Microchip, ComponentLink1Description=Datasheet, ComponentLink1URL=https://ww1.microchip.com/downloads/en/DeviceDoc/22057B.pdf, Copyright="Copyright (C) 2025 Ultra Librarian. All rights reserved.", Manufacturer_Part_Number=MCP1826S-3302E/DB, RefDes=RefDes, Type=Type
X1 X2: library part "Micro-Fit Molex 3 Pin Vertical", Package=43650-0315, DeviceName=43650-0315, DeviceSetName=HEADER_POS3_?, GateName_1=G$1, LibraryName=con-molex-micro-fit-3_0_2, SymbolName_1=HEADER_POS3
Y1: library part CRYSTAL-12MHz-30pF, "WE-XTAL Quartz Crystal, SMT, HC49/4HSMX, 12 MHz, ±30ppm", Case/Size Code=HC49/4HSMX, Frequency="12 MHz", Frequency Stability=50ppm, Frequency Tolerance=±30ppm, Load Capacitance=30pF, Manufacturer="Wurth Elektronik", Max Operating Temperature=60°C, Min Operating Temperature=-10°C, Application="Processor, USB, CAN", Category=Crystals, ComponentLink1Description="Website Link", ComponentLink1URL=https://www.we-online.com/redexpert/article/830010043?ad, ComponentLink2Description="Datasheet Link", ComponentLink2URL=https://www.we-online.com/redexpert/spec/830010043?ad, Height=4.5mm, Length=12.4mm, Manufacturer Part Number=830010043, Match Code=WE-XTAL, Mount="Surface Mount", Packaging="Tape and Reel", Width=4.7mm

## Nets (pads, with @x,y where several pads share a name; then routed paths per layer and width w, separated by ;. In a path a pad name is that pad's centre, name@x,y a point inside that pad or via, vN(x,y) a via of type N, cw(c..) or ccw(c..) an arc to the next point about the centre after c; other vN are vias at no path point)
3V3: C1.1 C2.1 C3.1 C4.1 C5.1 C6.1 C7.1 C8.1 C9.1 C10.1 C11.1 C31.1 C32.1 C34.1 D4.1 D5.1 J2.4 J3.4 J4.4 J5.4 J6.4 J7.4 J8.4 J9.4 J11.19 P1.2 P2.3 P2.7 P2.11 P2.15 P2.19 P2.23 P2.27 P2.31 R2.2 R3.2 R4.2 R18.2 R20.2 R22.1 R23.1 R24.1 R25.1 R26.1 R27.1 R28.1 R29.1 R30.1 R31.1 R32.1 R33.1 R34.1 R35.1 R36.1 R37.1 R38.1 R39.1 R40.1 U1.1 U1.16 U1.28 U1.29 U1.32 U1.48 U1.64 U3.5 U4.24 U5.3
3V3_VCCD: C21.1 C22.1 C23.1 C24.1 C25.1 L1.1 L2.1 R14.2 U2.12 U2.24 U2.39 U2.46
5V: C17.1 C18.1 C33.1 J11.18 L3.1 U2.40 U3.3 U5.1
5V_VBUS: C26.1 C27.1 D10.1 J1.1 L3.2
BOOT: R1.2 U1.61
CAN_H: R17.1 U3.7 X1.P$2 X2.P$2
CAN_L: R17.2 U3.6 X1.P$1 X2.P$1
CAN_RX_LED: R21.2 U1.36
CAN_STB: U3.8
CAN_TX_LED: R19.2 U1.35
CTS: U2.16
Data_In_N: D6.1 J1.2 R10.2
Data_In_P: D7.1 J1.3 R11.2
Data_N: R10.1 U2.6
Data_P: R11.1 U2.7
DCD: U2.19
DSR: U2.18
DTR: U2.17
EECLK: R15.1 U2.44
EECS: R13.1 U2.45
EEDATA: R16.1 U2.43
FDCAN_RX: U1.45 U3.4
FDCAN_TX: U1.46 U3.1
GND: C1.2 C2.2 C3.2 C4.2 C5.2 C6.2 C7.2 C8.2 C9.2 C10.2 C11.2 C12.2 C13.2 C14.2 C15.2 C16.2 C17.2 C18.2 C19.2 C20.2 C21.2 C22.2 C23.2 C24.2 C25.2 C26.2 C27.2 C28.1 C29.1 C30.2 C31.2 C32.2 C33.2 C34.2 D6.2 D7.2 D10.2 J1.5 J1.6 J1.7 J1.8 J1.9 J1.10 J1.11 J2.3 J3.3 J4.3 J5.3 J6.3 J7.3 J8.3 J9.3 J11.20 P1.1 P2.1 P2.5 P2.9 P2.13 P2.17 P2.21 P2.25 P2.29 Q1.2 Q2.2 Q3.2 Q4.2 Q5.2 R1.1 R12.2 R13.2 R15.2 R16.2 U1.15 U1.27 U1.31 U1.47 U1.63 U2.4 U2.9 U2.10 U2.11 U2.22 U2.23 U2.35 U2.36 U2.41 U2.42 U2.47 U2.48 U3.2 U4.1 U4.2 U4.12 U4.21 U5.2 U5.4 X1.P$3 X2.P$3
LED0: R5.2 U1.58
LED1: R6.2 U1.59
LED2: R7.2 U1.60
NetD1_1: D1.1 R2.1
NetD1_2: D1.2 Q1.3
NetD2_1: D2.1 R3.1
NetD2_2: D2.2 Q2.3
NetD3_1: D3.1 R4.1
NetD3_2: D3.2 Q3.3
NetD4_2: D4.2 R8.1
NetD5_2: D5.2 R9.1
NetD8_1: D8.1 R18.1
NetD8_2: D8.2 Q4.3
NetD9_1: D9.1 R20.1
NetD9_2: D9.2 Q5.3
NetQ1_1: Q1.1 R5.1
NetQ2_1: Q2.1 R6.1
NetQ3_1: Q3.1 R7.1
NetQ4_1: Q4.1 R19.1
NetQ5_1: Q5.1 R21.1
NetR12_1: R12.1 U2.5
NRST: C12.1 P1.5 U1.7
OSCI: C28.2 U2.1 Y1.1
OSCO: C29.2 U2.2 Y1.2
PA0: J10.1 U1.12
PA1: J10.2 U1.13
PA2: J10.3 U1.14
PA3: J10.4 U1.17
PA4: J10.5 U1.18
PA5: J10.6 U1.19
PA6: J10.7 U1.20
PA7: J10.8 U1.21
PA8: J10.9 U1.42
PA9: J10.10 U1.43
PA10: J10.11 U1.44
PA15: J10.12 U1.51
PB0: J10.13 U1.24
PB1: J10.14 U1.25
PB2: J10.15 U1.26
PB4: J10.16 U1.57
PB9: J10.17 U1.62
PB10: J10.18 U1.30
PB11: J10.19 U1.33
PB12: J10.20 U1.34
PC0: J11.1 U1.8
PC1: J11.2 U1.9
PC2: J11.3 U1.10
PC3: J11.4 U1.11
PC6: J11.5 U1.38
PC7: J11.6 U1.39
PC10: J11.9 U1.52
PC11: J11.10 U1.53
PC12: J11.11 U1.54
PC13: J11.12 U1.2
PC14: J11.13 U1.3
PC15: J11.14 U1.4
PD2: J11.15 U1.55
PF0: J11.16 U1.5
PF1: J11.17 U1.6
RESET_MUX: R40.2 U1.37 U4.3
RESET_USB_UART: C30.1 R14.1 U2.34
RI: U2.20
RTS: U2.15
RXD: U1.23 U2.13
RXLED: R8.2 U2.27
SCL0: J2.1 P2.4 R23.2 U4.5
SCL1: J4.1 P2.8 R25.2 U4.7
SCL2: J6.1 P2.12 R27.2 U4.9
SCL3: J8.1 P2.16 R29.2 U4.11
SCL4: J3.1 P2.20 R31.2 U4.14
SCL5: J5.1 P2.24 R33.2 U4.16
SCL6: J7.1 P2.28 R35.2 U4.18
SCL7: J9.1 P2.32 R37.2 U4.20
SCL_MCU: J11.7 R39.2 U1.40 U4.22
SDA0: J2.2 P2.2 R22.2 U4.4
SDA1: J4.2 P2.6 R24.2 U4.6
SDA2: J6.2 P2.10 R26.2 U4.8
SDA3: J8.2 P2.14 R28.2 U4.10
SDA4: J3.2 P2.18 R30.2 U4.13
SDA5: J5.2 P2.22 R32.2 U4.15
SDA6: J7.2 P2.26 R34.2 U4.17
SDA7: J9.2 P2.30 R36.2 U4.19
SDA_MCU: J11.8 R38.2 U1.41 U4.23
SWCLK: P1.4 U1.50
SWDIO: P1.3 U1.49
SWO: P1.6 U1.56
TXLED: R9.2 U2.28
VCCA: C15.1 U2.37
VCORE: C16.1 U2.38
VPHY: C13.1 C14.1 L1.2 U2.3
VPLL: C19.1 C20.1 L2.2 U2.8
pads on no net: J1.4 J1.S_1_H1 J1.S_1_H2 J1.S_2_H1 J1.S_2_H2 U1.22 U2.14 U2.21 U2.25 U2.26 U2.29 U2.30 U2.31 U2.32 U2.33 X1.1 X2.1

## Text inside footprints (layer, text, board x,y; h text height)
P2: Top Overlay "2" at 13485,3180 h50 r90; Top Overlay "1" at 13585,3180 h50 r90; Top Overlay "31" at 13585,4840 h50 r90; Top Overlay "32" at 13485,4840 h50 r90